# Altium PCB 23970修改.PcbDoc (part 1 of 2)
Units mm, origin at the board's own origin, x right, y up, seen from the top; angles counter-clockwise.
Board outline 62.06 x 76 mm, 2 copper layers (Top Layer, Bottom Layer); 25 components, 55 nets, 531 pads, 222 vias.
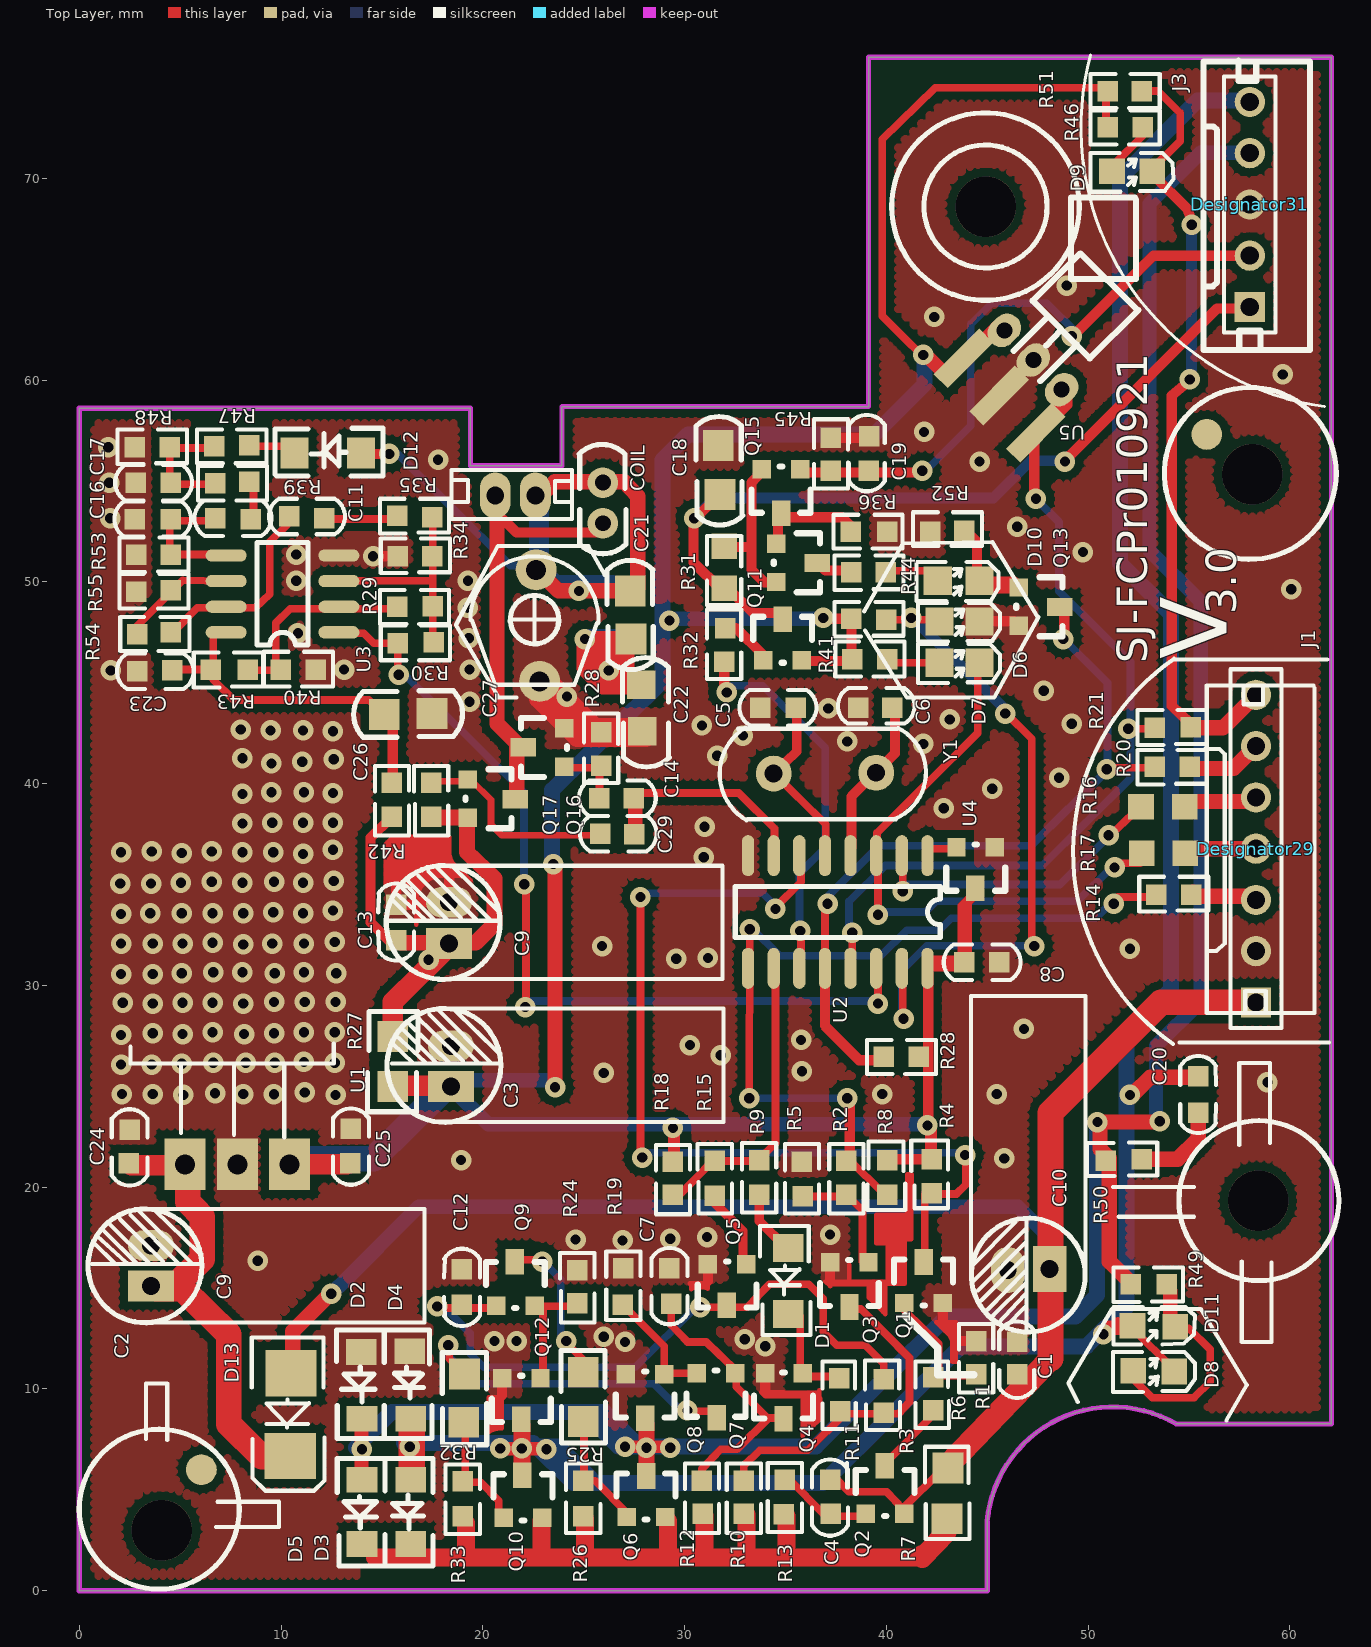
[diagram p0: Top Layer view]
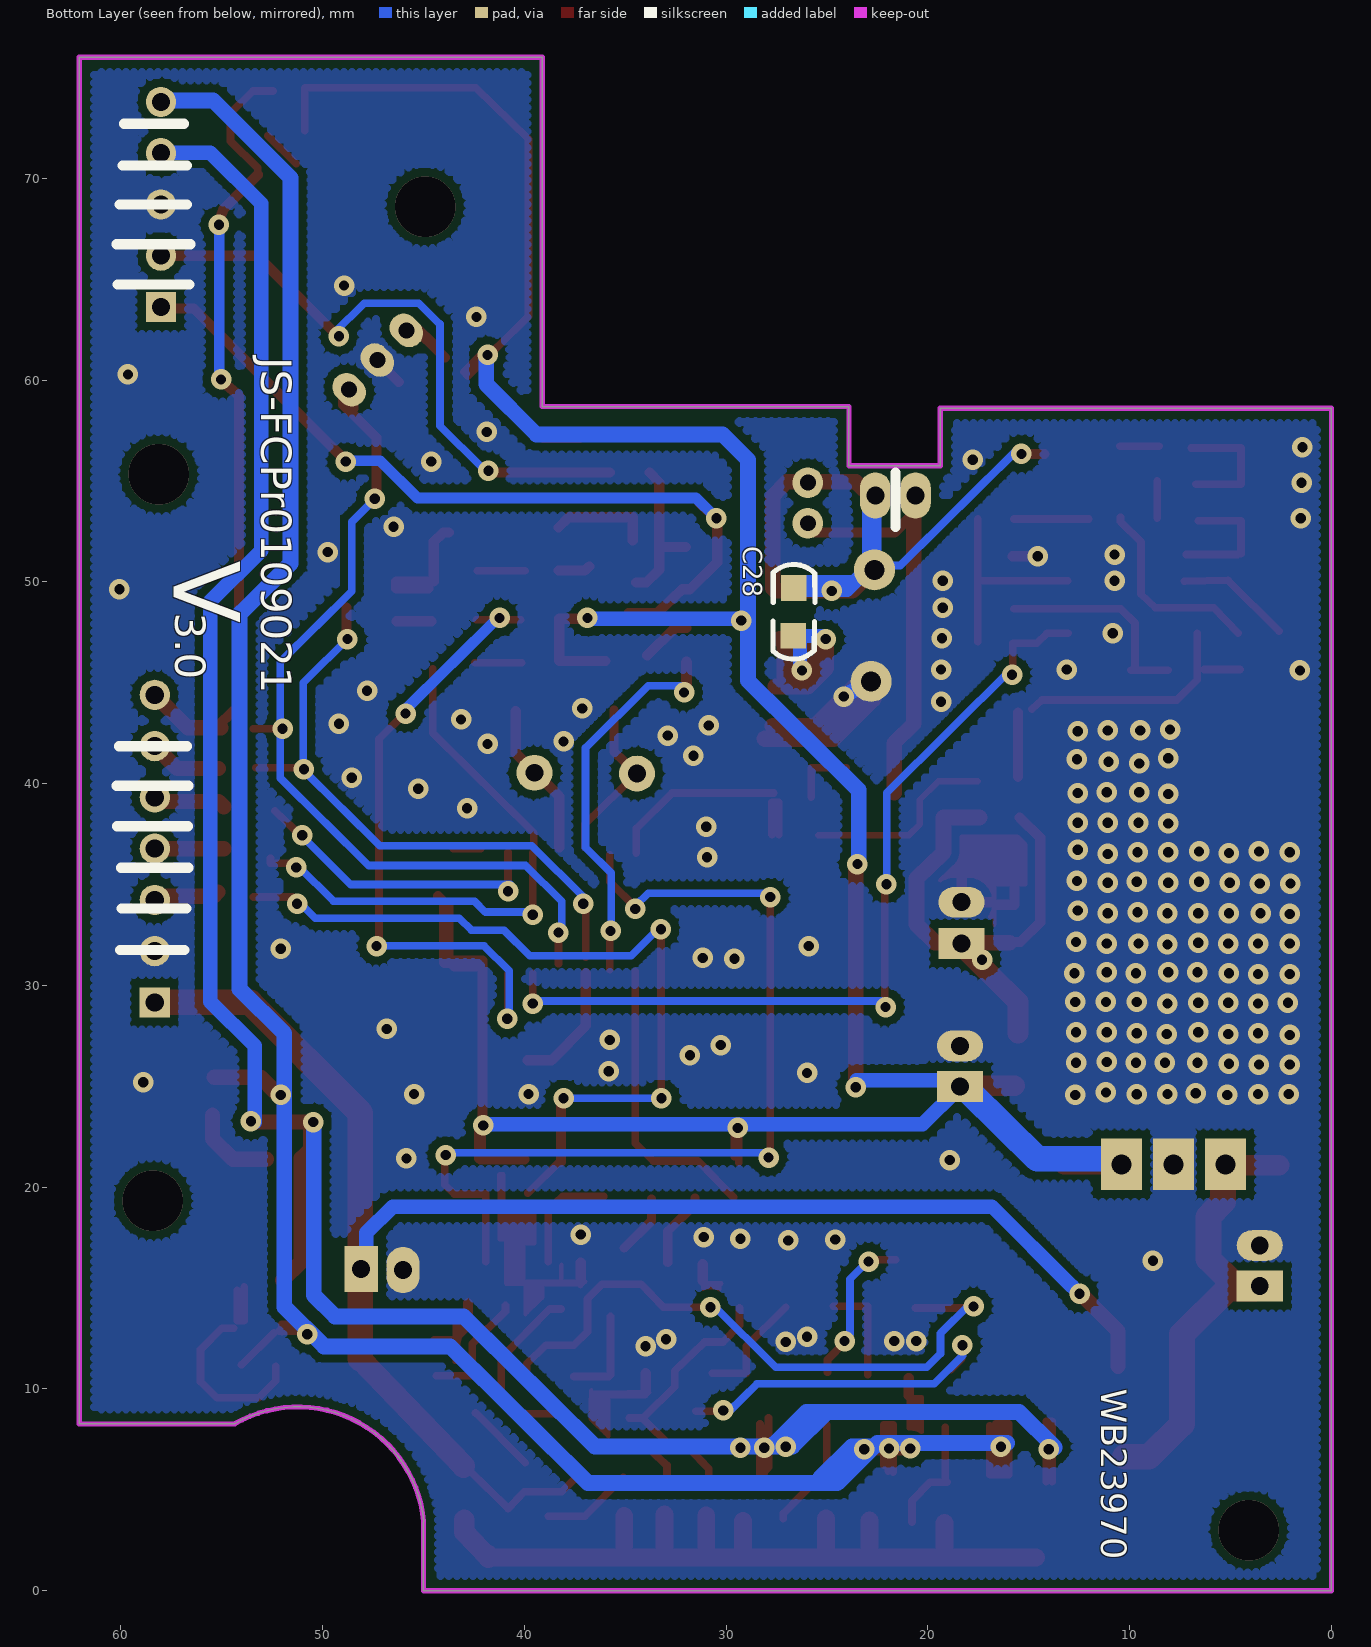
[diagram p1: Bottom Layer view, seen from below]

## Layer stack, top to bottom
Top Layer: signal copper 0.0356
Dielectric: core 0.32, FR-4, Dk 4.8
Bottom Layer: signal copper 0.0356

## Board outline
0,0 0,58.606 19.389,58.606 19.389,55.755 23.918,55.755 23.918,58.689 39.116,58.689 39.116,76 62.061,76 62.061,8.267 54.356,8.267 54.367,8.267 ccw(c51.223,2.86) 44.995,3.426 45,3.405 45,0

## Design rules (kind name [scope] priority, off if disabled: settings)
Clearance [All] p1: gap=0.2
PolygonConnect [All] p1: connectstyle=Direct reliefconductorwidth=0.254 reliefentries=4 polygonreliefangle="90 Angle"
RoutingPriority [All] p1: routingpriority=4
RoutingVias [All] p1: holewidth=0.508 width=1.27 viastyle="Through Hole" minholewidth=0.711 minwidth=1.27 maxholewidth=0.711 maxwidth=1.27
SilkscreenOverComponentPads [All] p1: minsilkscreentomaskgap=0.254
SolderMaskExpansion SolderMaskExpansion_2 [HasPad('Free-266')] p1: expansion=0.051
SolderMaskExpansion SolderMaskExpansion_1 [HasPad('Free-267')] p2: expansion=0.051
SolderMaskExpansion [All] p3: expansion=0.102
Width [All] p1: maxlimit=0.254 minlimit=0.254 preferedwidth=0.254
26 further rules are at their usual default settings.

## Components (designator, comment, footprint, x,y, rotation, side; value= is the part's Value field where it differs from the comment)
Designator29 "Comment" HDR1X7 58.318,29.159 r90 top
Designator31 "Comment" HDR1X5 58.013,63.627 r90 top
? "" a 62.061,8.267 r180 top
? "" SO-16 42.037,36.433 r270 top
? "" SOT-23#1 21.04,3.614 r0 top
? "" SOT-23#2 27.136,3.656 r0 top
? "" SOT-23#3 38.989,3.824 r0 top
? "" SOT-23#4 40.894,14.26 r0 top
? "" SOT-23#5 39.116,16.272 r180 top
? "" SOT-23#6 33.062,16.188 r180 top
? "" SOT-23#7 20.659,14.135 r0 top
? "" SOT-23#8 22.86,10.53 r180 top
? "" SOT-23#9 28.998,10.74 r180 top
? "" SOT-23#10 32.512,10.782 r180 top
? "" SOT-23#11 35.856,10.698 r180 top
? "" SOT-23#12 45.381,36.852 r180 top
? "" SOT-23#13 19.262,40.205 r270 top
? "" SOT-23#14 35.729,55.588 r180 top
? "" SOT-23#15 34.544,51.899 r270 top
? "" SOT-23#16 24.045,40.834 r90 top
? "" SOT-23#17 33.909,46.115 r0 top
? "" SOT-23#18 46.567,49.72 r270 top
? "" SO-8 12.869,47.498 r180 top
? "" a 0,0 r90 top
? "" a 62.061,76 r270 top

## Footprints (in the part's own frame and the unit in brackets; to place one, negate y for a bottom-side part, rotate by r counter-clockwise, add the part's x,y. Pads: shape width x height; smd on the part's side, far side on the other; paste and mask are expansions set on the pad)
a [mm]
  Keep-Out Layer lines w0.254: 0.406,0 0,0 0,-0.406
HDR1X5 [mm] "Connector; Header; 5 Position"
  rect 1.5x1.5 hole 0.9: 1(0,0)
  round 1.5 hole 0.9: 2(2.54,0) 3(5.08,0) 4(7.62,0) 5(10.16,0)
  silkscreen extent -1.27,-1.27 11.43,1.27
HDR1X7 [mm] "Connector; Header; 7 Position"
  rect 1.5x1.5 hole 0.9: 1(0,0)
  round 1.5 hole 0.9: 2(2.54,0) 3(5.08,0) 4(7.62,0) 5(10.16,0) 6(12.7,0) 7(15.24,0)
  silkscreen extent -1.27,-1.27 16.51,1.27
SO-8 [mil]
  oval 80x24 smd: 71(220,0) 72(220,-50) 73(220,-100) 74(220,-150) 75(0,-150) 76(0,-100) 77(0,-50) 78(0,0)
  silkscreen extent 60,-175 160,25
SO-16 [mil]
  oval 80x24 smd: 1(220,0) 2(220,-50) 3(220,-100) 4(220,-150) 5(220,-200) 6(220,-250) 7(220,-300) 8(220,-350) 9(0,-350) 10(0,-300) 11(0,-250) 12(0,-200) 13(0,-150) 14(0,-100) 15(0,-50) 16(0,0)
  silkscreen extent 60,-375 160,25
SOT-23#1 [mil]
  rect 36x36 smd: 17(0,0) 18(75,0)
  rect 36x50 smd: 19(35.89,83.33)
  silkscreen extent -20,-5 95,85
SOT-23#2 [mil]
  rect 36x36 smd: 20(0,0) 21(75,0)
  rect 36x50 smd: 22(38,80)
  silkscreen extent -20,-5 95,85
SOT-23#3 [mil]
  rect 36x36 smd: 23(0,0) 24(75,0)
  rect 36x50 smd: 25(36.72,93.65)
  silkscreen extent -20,-5 95,85
SOT-23#4 [mil]
  rect 36x36 smd: 26(0,0) 27(75,0)
  rect 36x50 smd: 28(38,80)
  silkscreen extent -20,-5 95,85
SOT-23#5 [mil]
  rect 36x36 smd: 29(0,0) 30(75,0)
  rect 36x50 smd: 31(37.13,87.05)
  silkscreen extent -20,-5 95,85
SOT-23#6 [mil]
  rect 36x36 smd: 32(0,0) 33(75,0)
  rect 36x50 smd: 34(38,80)
  silkscreen extent -20,-5 95,85
SOT-23#7 [mil]
  rect 36x36 smd: 35(0,0) 36(75,0)
  rect 36x50 smd: 37(36.72,85.81)
  silkscreen extent -20,-5 95,85
SOT-23#8 [mil]
  rect 36x36 smd: 38(0,0) 39(75,0)
  rect 36x50 smd: 40(38,80)
  silkscreen extent -20,-5 95,85
SOT-23#9 [mil]
  rect 36x36 smd: 41(0,0) 42(75,0)
  rect 36x50 smd: 43(37.13,86.22)
  silkscreen extent -20,-5 95,85
SOT-23#10 [mil]
  rect 36x36 smd: 44(0,0) 45(75,0)
  rect 36x50 smd: 46(36.3,87.05)
  silkscreen extent -20,-5 95,85
SOT-23#11 [mil]
  rect 36x36 smd: 47(0,-2.89) 48(73.43,-3.3)
  rect 36x50 smd: 49(37.54,85.81)
  silkscreen extent -20,-5 95,85
SOT-23#12 [mil]
  rect 36x36 smd: 50(0,0) 51(75,0)
  rect 36x50 smd: 52(38,80)
  silkscreen extent -20,-5 95,85
SOT-23#13 [mil]
  rect 36x36 smd: 53(0,0) 54(75,0)
  rect 36x50 smd: 55(38.37,92.41)
  silkscreen extent -20,-5 95,85
SOT-23#14 [mil]
  rect 36x36 smd: 56(0,0) 57(75,0)
  rect 36x50 smd: 58(37.13,86.22)
  silkscreen extent -20,-5 95,85
SOT-23#15 [mil]
  rect 36x36 smd: 59(0,0) 60(75,0)
  rect 36x50 smd: 61(38.01,80)
  silkscreen extent -20,-5 95,85
SOT-23#16 [mil]
  rect 36x36 smd: 62(0,0) 63(75,0)
  rect 36x50 smd: 64(38.01,80)
  silkscreen extent -20,-5 95,85
SOT-23#17 [mil]
  rect 36x36 smd: 65(0,0) 66(75,0)
  rect 36x50 smd: 67(38.01,80)
  silkscreen extent -20,-5 95,85
SOT-23#18 [mil]
  rect 36x36 smd: 68(0,0) 69(75,0)
  rect 36x50 smd: 70(38.01,80)
  silkscreen extent -20,-5 95,85

## Free pads (board coordinates)
  round 0.254 all layers, no hole: 0(1.439,56.678) 0(1.482,54.917) 0(1.524,53.157) 0(1.566,45.612) 0(2.032,35.05) 0(2.074,26.08) 0(2.074,27.547) 0(2.074,30.565) 0(2.074,32.074) 0(2.074,33.541) 0(2.074,36.601) 0(2.117,24.613) 0(2.159,29.14) 0(3.514,33.583) 0(3.556,35.05) 0(3.598,26.08) 0(3.598,36.643) 0(3.641,24.613) 0(3.641,27.631) 0(3.641,29.098) 0(3.641,30.565) 0(3.641,32.074) 0(5.038,35.092) 0(5.08,26.122) 0(5.08,30.607) 0(5.08,33.583) 0(5.08,36.559) 0(5.122,27.589) 0(5.122,29.14) 0(5.122,32.074) 0(5.165,24.571) 0(6.562,35.134) 0(6.562,36.643) 0(6.604,27.673) 0(6.604,29.14) 0(6.604,32.116) 0(6.604,33.583) 0(6.646,26.164) 0(6.646,30.649) 0(6.731,24.655) 0(8.001,42.678) 0(8.086,30.649) 0(8.086,35.092) 0(8.086,36.601) 0(8.086,38.026) 0(8.086,39.493) 0(8.086,41.253) 0(8.128,24.613) 0(8.128,29.098) 0(8.128,32.032) 0(8.128,33.583) 0(8.17,27.589) 0(8.255,26.164) 0(8.848,16.356) 0(9.483,42.636) 0(9.525,39.577) 0(9.525,41.002) 0(9.567,32.074) 0(9.567,38.068) 0(9.61,33.625) 0(9.61,36.601) 0(9.652,24.613) 0(9.652,27.631) 0(9.652,29.182) 0(9.652,35.134) 0(9.694,26.164) 0(9.694,30.607) 0(10.753,50.055) 0(10.753,51.354) 0(10.837,47.456) 0(11.049,41.085) 0(11.091,33.583) 0(11.091,35.092) 0(11.091,36.517) 0(11.091,38.068) 0(11.091,42.636) 0(11.134,26.206) 0(11.134,27.673) 0(11.134,30.649) 0(11.134,32.074) 0(11.134,39.577) 0(11.176,24.697) 0(11.176,29.182) 0(12.488,14.721) 0(12.573,33.709) 0(12.573,36.726) 0(12.573,38.068) 0(12.573,39.535) 0(12.573,42.594) 0(12.615,35.176) 0(12.615,41.211) 0(12.658,26.164) 0(12.658,27.673) 0(12.658,32.158) 0(12.7,24.571) 0(12.7,29.182) 0(12.742,30.607) 0(13.123,45.654) 0(14.012,7.009) 0(14.563,51.271) 0(15.367,56.342) 0(15.833,45.403) 0(16.383,7.135) 0(17.314,31.278) 0(17.738,14.093) 0(17.78,56.049) 0(18.288,12.165) 0(18.923,21.344) 0(19.262,48.714) 0(19.262,50.055) 0(19.304,47.205) 0(19.346,44.061) 0(19.346,45.654) 0(20.574,12.374) 0(20.87,7.051) 0(21.675,12.374) 0(21.929,7.051) 0(22.056,35.008) 0(22.098,28.93) 0(22.945,16.314) 0(23.156,7.009) 0(23.495,36.014) 0(23.58,24.949) 0(24.13,12.374) 0(24.172,44.313) 0(24.596,17.404) 0(24.765,49.552) 0(25.061,47.163) 0(25.908,31.948) 0(25.993,12.584) 0(25.993,25.661) 0(26.247,45.612) 0(26.924,17.362) 0(27.051,7.135) 0(27.051,12.332) 0(27.813,34.379) 0(27.898,21.47) 0(28.109,7.093) 0(29.252,48.085) 0(29.295,7.093) 0(29.295,17.446) 0(29.422,22.937) 0(29.591,31.319) 0(30.141,8.937) 0(30.268,27.044) 0(30.48,53.157) 0(30.776,14.051) 0(30.861,42.888) 0(30.946,36.349) 0(30.988,37.858) 0(31.115,17.53) 0(31.157,31.361) 0(31.623,41.379) 0(31.792,26.541) 0(32.089,44.522) 0(32.893,42.385) 0(32.978,12.458) 0(33.21,24.404) 0(33.232,32.786) 0(33.994,12.123) 0(34.502,33.792) 0(35.729,32.703) 0(35.772,27.296) 0(35.814,25.745) 0(36.872,48.211) 0(37.084,34.044) 0(37.126,43.726) 0(37.211,17.655) 0(38.058,24.404) 0(38.058,42.091) 0(38.312,32.619) 0(39.582,29.098) 0(39.582,33.499) 0(39.793,24.613) 0(40.809,34.673) 0(40.852,28.344) 0(41.233,48.211) 0(41.783,55.504) 0(41.825,41.966) 0(41.825,61.246) 0(41.868,57.432) 0(42.037,23.062) 0(42.376,63.132) 0(42.841,38.78) 0(43.138,43.181) 0(43.9,21.595) 0(44.619,55.965) 0(45.254,39.744) 0(45.466,24.613) 0(45.847,21.428) 0(45.889,43.475) 0(46.482,52.738) 0(46.821,27.841) 0(47.329,31.948) 0(47.413,54.121) 0(47.794,44.606) 0(48.556,40.289) 0(48.768,47.163) 0(48.853,55.965) 0(48.937,64.683) 0(49.191,42.972) 0(49.191,62.168) 0(49.742,51.48) 0(50.461,23.23) 0(50.758,12.71) 0(50.927,40.708) 0(51.012,37.439) 0(51.266,34.044) 0(51.308,35.846) 0(51.985,42.72) 0(52.07,24.571) 0(52.07,31.822) 0(53.552,23.272) 0(55.033,60.031) 0(55.139,67.701) 0(58.886,25.2) 0(59.648,60.282) 0(60.071,49.636)
  round 0.584 on Top Solder: 7(19.795,56.162) 7(23.512,56.162)
  round 0.584 on Bottom Solder: 7(19.795,56.162) 7(23.512,56.162)
  round 1.524 smd: 79(6.054,6.003) 80(55.88,57.306)
  rect 1.016x1.016 smd: 81(52.663,74.323) 82(52.705,72.521) 83(50.969,72.521) 84(50.969,74.323) 85(55.076,42.804) 86(55.033,40.834) 87(53.298,42.762) 88(53.298,40.834) 89(55.118,34.505) 90(53.382,34.505) 91(55.457,23.691) 92(55.457,25.493) 93(52.663,21.386) 94(50.885,21.302) 95(52.112,15.183) 96(53.89,15.183) 97(42.249,21.386) 98(42.249,19.709) 99(41.614,26.457) 100(39.878,26.457) 101(40.047,21.344) 102(40.047,19.625) 103(38.015,21.302) 104(38.015,19.625) 105(35.814,21.26) 106(35.856,19.542) 107(33.697,21.344) 108(33.697,19.625) 109(31.496,21.302) 110(31.496,19.584) 111(29.422,21.26) 112(29.422,19.625) 113(29.252,15.979) 114(29.337,14.218) 115(26.966,15.979) 116(26.924,14.177) 117(24.68,14.26) 118(24.68,15.895) 119(24.977,5.458) 120(24.977,3.698) 121(19.008,3.698) 122(19.008,5.416) 123(18.965,14.177) 124(18.965,15.937) 125(13.462,22.895) 126(13.42,21.176) 127(15.706,32.242) 128(15.706,34.002) 129(17.441,38.361) 130(17.441,40.038) 131(15.494,40.038) 132(15.494,38.361) 133(15.79,46.953) 134(17.568,46.995) 135(17.526,48.798) 136(15.748,48.756) 137(17.484,51.271) 138(15.79,51.271) 139(15.748,53.283) 140(17.484,53.199) 141(12.15,53.157) 142(10.414,53.241) 143(8.509,53.115) 144(6.731,53.157) 145(6.731,54.875) 146(8.424,54.959) 147(8.424,56.761) 148(6.689,56.719) 149(4.487,56.678) 150(2.752,56.678) 151(2.794,54.917) 152(4.53,54.917) 153(4.53,53.115) 154(2.752,53.115) 155(4.53,51.354) 156(2.836,51.354) 157(4.53,49.594) 158(2.836,49.51) 159(4.53,47.498) 160(2.879,47.415) 161(2.879,45.57) 162(4.614,45.612) 163(6.519,45.654) 164(8.34,45.654) 165(9.991,45.654) 166(11.726,45.654) 167(30.861,5.458) 168(30.903,3.824) 169(32.935,5.458) 170(32.935,3.824) 171(34.967,5.5) 172(34.925,3.782) 173(37.211,5.5) 174(37.253,3.824) 175(39.878,10.488) 176(39.878,8.812) 177(37.677,10.53) 178(37.719,8.895) 179(42.333,10.572) 180(42.333,8.937) 181(44.45,10.74) 182(46.482,10.74) 183(43.857,31.152) 184(45.593,31.152) 185(33.74,43.768) 186(35.518,43.768) 187(38.608,43.774) 188(40.301,43.768) 189(40.047,46.157) 190(38.312,46.157) 191(38.269,48.169) 192(40.005,48.127) 193(38.269,50.474) 194(39.963,50.474) 195(38.227,52.486) 196(40.047,52.486) 197(42.164,52.486) 198(43.857,52.528) 199(39.116,55.504) 200(39.158,57.222) 201(37.253,57.139) 202(37.253,55.504) 203(25.866,40.876) 204(25.866,42.552) 205(2.498,22.853) 206(2.455,21.176) 207(31.962,46.031) 208(32.004,47.708) 209(25.781,39.283) 210(25.823,37.523) 211(27.474,39.283) 212(27.517,37.481) 264(46.482,12.332) 265(44.45,12.374)
  rect 1.27x1.27 smd: 213(54.779,38.864) 214(52.62,38.864) 215(52.663,36.559) 216(54.822,36.559) 217(52.197,13.129) 218(54.314,13.087) 219(54.271,10.865) 220(52.239,10.907) 221(31.962,51.774) 222(31.962,49.678) 225(53.171,70.342) 226(51.181,70.342)
  rect 1.397x1.397 smd: 223(27.898,42.594) 224(27.855,44.9) 253(42.545,50.055) 254(42.63,48.043) 255(42.63,45.989) 256(44.619,45.989) 257(44.619,48.043) 258(44.619,50.055)
  rect 1.524x1.524 smd: 227(43.053,6.087) 228(43.011,3.572) 229(24.977,8.392) 230(24.977,10.823) 231(19.05,8.351) 232(19.092,10.74) 241(15.536,24.99) 242(15.536,27.463) 243(17.484,43.475) 244(15.113,43.433) 245(27.305,49.552) 246(27.347,47.163) 247(31.75,54.33) 248(31.665,56.761)
  rect 1.524x1.27 smd: 233(16.425,2.315) 234(16.425,5.5) 235(14.012,5.5) 236(14.012,2.315) 237(16.425,8.518) 238(14.012,8.518) 239(16.383,11.871) 240(13.97,11.829)
  rect 1.524x1.397 smd: 249(35.137,13.716) 250(35.137,16.985)
  rect 1.397x1.524 smd: 251(10.668,56.384) 252(13.97,56.384)
  rect 2.54x2.286 smd: 259(10.456,6.674) 260(10.499,10.782)
  rect 0.991x3.2 smd rot 135: 261(47.413,57.39) 262(45.593,59.234) 263(43.815,61.079)
  rect 1.27x1.27 smd far side: 266(26.649,49.699) 267(26.67,47.331)
  oval 2.286x1.524 hole 0.889: 281(18.33,34.128) 282(18.415,27.002) 283(3.556,17.111)
  rect 2.286x1.524 hole 0.889: 284(3.556,15.099) 285(18.415,24.99) 286(18.33,32.074)
  rect 1.651x2.286 hole 0.889: 287(48.091,15.937)
  oval 1.651x2.286 hole 0.889: 288(46.016,15.895)
  oval 1.524x2.286 hole 0.889: 289(22.606,54.288) 290(20.616,54.288)
  rect 2.032x2.54 hole 0.991: 291(10.414,21.134) 292(7.832,21.134) 293(5.249,21.134)
  oval 1.778x1.397 hole 0.787 rot 45: 294(48.683,59.528) 295(47.286,60.995) 296(45.847,62.462)
  round 1.524 hole 0.787: 297(25.95,52.905) 298(25.95,54.917)
  round 2.032 hole 0.991: 299(22.648,50.6) 300(22.818,45.067)
  round 1.778 hole 0.889: 301(34.417,40.499) 302(39.497,40.541)
  round 2.997 on Top Solder: 303(58.42,19.332) 304(58.124,55.336) 305(44.916,68.602) 306(4.106,3.027)
  round 2.997 on Bottom Solder: 303(58.42,19.332) 304(58.124,55.336) 305(44.916,68.602) 306(4.106,3.027)

## Via types
v1: diameter 1.016, hole 0.508, Top Layer to Bottom Layer, 218 vias
v2: diameter 3, hole 3, Top Layer to Bottom Layer, 4 vias

## Nets (pads, with @x,y where several pads share a name; then routed paths per layer and width w, separated by ;. In a path a pad name is that pad's centre, name@x,y a point inside that pad or via, vN(x,y) a via of type N, cw(c..) or ccw(c..) an arc to the next point about the centre after c; other vN are vias at no path point)
NewNet1: 
NewNet2: ?.71 pad.131 pad.162 pad.163 pad.244 | length 16.1
  Top Layer w0.381: pad.162@4.53,45.654 pad.163@6.308,45.654 ; ?.71@6.646,47.456 6.646,45.151 7.662,44.145 14.351,44.145 pad.244@14.859,43.684
  Top Layer w0.508: pad.131@15.536,40.331 pad.244@15.536,43.516
NewNet3: ?.72 pad.142 pad.159 | length 9.9
  Top Layer w0.381: pad.159@4.614,47.456 5.842,48.714 8.721,48.714 9.44,49.385 9.44,51.983 10.456,52.989 pad.142@10.456,53.199
NewNet4: ?.73 pad.157 pad.160 | length 5.7
  Top Layer w0.381: pad.160@2.599,47.549 5.131,50.073 ?.73@7.281,50.038
NewNet5: ?.74 pad.144 pad.153 pad.155 | length 6.3
  Top Layer w0.381: pad.155@4.487,51.396 4.487,53.031 pad.144@6.604,53.031 ; pad.155@4.657,51.354 ?.74@7.197,51.354
NewNet6: ?.9 ?.27 ?.30 ?.33 ?.39 ?.42 ?.48 ?.50 ?.63 ?.69 ?.75 Designator29.2 Designator31.3 pad.0@1.439,56.678 pad.0@1.482,54.917 pad.0@1.524,53.157 pad.0@1.566,45.612 pad.0@2.032,35.05 pad.0@2.074,26.08 pad.0@2.074,27.547 pad.0@2.074,30.565 pad.0@2.074,32.074 pad.0@2.074,33.541 pad.0@2.074,36.601 pad.0@2.117,24.613 pad.0@2.159,29.14 pad.0@3.514,33.583 pad.0@3.556,35.05 pad.0@3.598,26.08 pad.0@3.598,36.643 pad.0@3.641,24.613 pad.0@3.641,27.631 pad.0@3.641,29.098 pad.0@3.641,30.565 pad.0@3.641,32.074 pad.0@5.08,26.122 pad.0@5.08,30.607 pad.0@5.08,33.583 pad.0@5.08,36.559 pad.0@5.038,35.092 pad.0@5.122,27.589 pad.0@5.122,29.14 pad.0@5.122,32.074 pad.0@5.165,24.571 pad.0@6.562,35.134 pad.0@6.562,36.643 pad.0@6.604,27.673 pad.0@6.604,29.14 pad.0@6.604,32.116 pad.0@6.604,33.583 pad.0@6.646,26.164 pad.0@6.646,30.649 pad.0@6.731,24.655 pad.0@8.001,42.678 pad.0@8.17,27.589 pad.0@8.086,30.649 pad.0@8.086,35.092 pad.0@8.086,36.601 pad.0@8.086,38.026 pad.0@8.086,39.493 pad.0@8.086,41.253 pad.0@8.128,24.613 pad.0@8.128,29.098 pad.0@8.128,32.032 pad.0@8.128,33.583 pad.0@8.255,26.164 pad.0@8.848,16.356 pad.0@9.61,33.625 pad.0@9.61,36.601 pad.0@9.483,42.636 pad.0@9.525,39.577 pad.0@9.525,41.002 pad.0@9.567,32.074 pad.0@9.567,38.068 pad.0@9.652,24.613 pad.0@9.652,27.631 pad.0@9.652,29.182 pad.0@9.652,35.134 pad.0@9.694,26.164 pad.0@9.694,30.607 pad.0@10.753,50.055 pad.0@10.753,51.354 pad.0@10.837,47.456 pad.0@11.049,41.085 pad.0@11.091,33.583 pad.0@11.091,35.092 pad.0@11.091,36.517 pad.0@11.091,38.068 pad.0@11.091,42.636 pad.0@11.134,26.206 pad.0@11.134,27.673 pad.0@11.134,30.649 pad.0@11.134,32.074 pad.0@11.134,39.577 pad.0@11.176,24.697 pad.0@11.176,29.182 pad.0@12.7,24.571 pad.0@12.7,29.182 pad.0@12.573,33.709 pad.0@12.573,36.726 pad.0@12.573,38.068 pad.0@12.573,39.535 pad.0@12.573,42.594 pad.0@12.615,35.176 pad.0@12.615,41.211 pad.0@12.658,26.164 pad.0@12.658,27.673 pad.0@12.658,32.158 pad.0@12.742,30.607 pad.0@13.123,45.654 pad.0@14.563,51.271 pad.0@17.78,56.049 pad.0@18.923,21.344 pad.0@19.262,48.714 pad.0@19.262,50.055 pad.0@19.304,47.205 pad.0@19.346,44.061 pad.0@19.346,45.654 pad.0@20.574,12.374 pad.0@21.675,12.374 pad.0@24.172,44.313 pad.0@24.596,17.404 pad.0@25.908,31.948 pad.0@25.993,12.584 pad.0@25.993,25.661 pad.0@26.924,17.362 pad.0@27.051,12.332 pad.0@29.295,17.446 pad.0@29.591,31.319 pad.0@30.268,27.044 pad.0@30.861,42.888 pad.0@30.946,36.349 pad.0@30.988,37.858 pad.0@31.115,17.53 pad.0@31.157,31.361 pad.0@31.623,41.379 pad.0@31.792,26.541 pad.0@32.893,42.385 pad.0@32.978,12.458 pad.0@33.994,12.123 pad.0@35.772,27.296 pad.0@35.814,25.745 pad.0@37.126,43.726 pad.0@37.211,17.655 pad.0@38.058,42.091 pad.0@39.793,24.613 pad.0@41.825,41.966 pad.0@41.868,57.432 pad.0@42.376,63.132 pad.0@42.841,38.78 pad.0@43.138,43.181 pad.0@44.619,55.965 pad.0@45.254,39.744 pad.0@45.466,24.613 pad.0@45.847,21.428 pad.0@46.482,52.738 pad.0@46.821,27.841 pad.0@47.794,44.606 pad.0@48.556,40.289 pad.0@48.937,64.683 pad.0@49.191,42.972 pad.0@49.742,51.48 pad.0@52.07,31.822 pad.0@58.886,25.2 pad.0@59.648,60.282 pad.0@60.071,49.636 pad.105 pad.113 pad.115 pad.118 pad.124 pad.125 pad.128 pad.138 pad.150 pad.151 pad.154 pad.156 pad.158 pad.161 pad.166 pad.184 pad.185 pad.187 pad.196 pad.197 pad.200 pad.201 pad.204 pad.205 pad.223 pad.239 pad.240 pad.243 pad.248 pad.257 pad.262 pad.264 pad.265 pad.281 pad.282 pad.283 pad.288 pad.292 pad.295 pad.300 | length 263.1
  Top Layer w0.216: v1@14.372,51.254 v1@14.793,51.254 ; 15.179,35.201 17.254,35.201 ; 15.179,35.404 17.7,35.404 ; 15.179,35.608 18.98,35.608 ; 15.179,35.811 18.768,35.811 ; 15.179,36.014 18.56,36.014 ; 15.179,36.217 18.424,36.217 ; 15.179,36.42 18.355,36.42 ; 15.179,36.624 18.337,36.624 ; 15.179,36.827 18.337,36.827 ; 15.206,37.03 18.337,37.03 ; 15.265,34.999 15.265,37.089 ; 15.411,37.233 18.337,37.233 ; 15.469,34.999 15.469,37.29 ; 15.672,34.999 15.672,37.364 ; 15.875,34.999 15.875,37.364 ; 16.078,34.999 16.078,37.364 ; 16.281,34.999 16.281,37.364 ; 16.444,37.364 15.543,37.364 15.179,37.003 15.179,34.999 16.703,34.999 16.703,34.233 cw(c18.013,34.128) 18.013,35.442 18.648,35.442 cw(c18.648,34.128) 19.395,35.209 18.609,35.963 cw(c19.219,36.601) 18.337,36.601 ; 16.491,37.364 18.315,37.364 ; 16.688,34.999 16.688,37.364 ; 16.698,33.005 16.698,33.239 16.698,33.388 ; 16.703,33.576 16.82,33.576 ; 16.703,34.592 16.783,34.592 ; 16.703,34.795 16.88,34.795 ; 16.703,34.998 17.028,34.998 ; 16.891,34.813 16.891,37.364 ; 17.094,35.068 17.094,37.364 ; 17.297,35.23 17.297,37.364 ; 17.501,35.338 17.501,37.364 ; 17.704,35.405 17.704,37.364 ; 17.907,35.438 17.907,37.364 ; 18.11,35.442 18.11,37.364 ; 18.313,35.442 18.313,37.364 ; 18.337,37.354 18.337,36.601 ; 18.517,35.442 18.517,36.067 ; 18.608,35.964 cw(c19.219,36.601) 18.337,36.601 ; 18.72,35.44 18.72,35.857 ; 18.923,35.413 18.923,35.662 ; 18.961,35.404 19.192,35.404 ; 19.126,35.352 19.126,35.467 ; 20.301,7.972 20.489,7.972 ; 20.301,8.176 20.949,8.176 ; 20.301,8.379 20.949,8.379 ; 20.301,8.582 20.949,8.582 ; 20.301,8.785 20.949,8.785 ; 20.301,8.988 20.949,8.988 ; 20.301,9.192 20.949,9.192 ; 20.301,9.395 20.949,9.395 ; 20.301,9.584 20.301,9.489 20.301,7.87 cw(c20.87,7.051) 20.87,8.048 cw(c20.87,7.051) 20.949,8.045 20.949,9.584 20.343,9.584 20.343,9.489 ; 20.345,7.899 20.345,9.584 ; 20.549,7.995 20.549,9.584 ; 20.752,8.041 20.752,9.584 ; 30.249,15.215 30.334,15.215 30.334,14.944 cw(c30.776,14.051) 30.776,15.048 cw(c30.776,14.051) 31.151,14.975 31.151,15.242 30.249,15.242 ; 30.334,15.084 31.151,15.084 ; 30.505,15.01 30.505,15.242 ; 30.709,15.045 30.709,15.242 ; 30.912,15.039 30.912,15.242 ; 31.115,14.988 31.115,15.242 ; 33.833,9.801 36.68,9.801 ; 33.96,9.675 33.96,9.835 ; 34.163,9.642 34.163,9.835 ; 34.366,9.642 34.366,9.835 ; 34.569,9.642 34.569,9.835 ; 34.773,9.642 34.773,9.835 ; 34.91,9.825 36.68,9.825 ; 34.91,9.835 33.798,9.835 33.994,9.642 35.849,9.642 35.849,7.665 36.722,8.529 36.722,9.533 ; 34.976,9.642 34.976,9.825 ; 35.179,9.642 35.179,9.825 ; 35.382,9.642 35.382,9.825 ; 35.585,9.642 35.585,9.825 ; 35.789,9.642 35.789,9.825 ; 35.849,7.769 35.954,7.769 ; 35.849,7.972 36.16,7.972 ; 35.849,8.176 36.365,8.176 ; 35.849,8.379 36.57,8.379 ; 35.849,8.582 36.722,8.582 ; 35.849,8.785 36.722,8.785 ; 35.849,8.988 36.722,8.988 ; 35.849,9.192 36.722,9.192 ; 35.849,9.395 36.722,9.395 ; 35.849,9.598 36.68,9.598 ; 35.992,7.806 35.992,9.825 ; 36.195,8.007 36.195,9.825 ; 36.398,8.209 36.398,9.825 ; 36.601,8.41 36.601,9.825 ; 36.68,9.533 36.68,9.825 ; 36.68,9.934 36.68,9.825 ; 37.012,15.288 40.913,15.288 ; 37.211,15.091 37.211,15.326 ; 37.414,15.185 37.414,15.326 ; 37.617,15.185 37.617,15.326 ; 37.821,15.185 37.821,15.326 ; 38.024,15.185 38.024,15.326 ; 38.157,16.163 38.157,15.326 36.973,15.326 37.227,15.075 37.227,15.185 39.119,15.185 39.119,14.527 ; 38.17,16.116 38.17,15.326 40.062,15.326 40.062,17.218 39.499,17.218 39.499,18.628 41.044,18.628 41.044,20.347 ; 38.227,15.185 38.227,15.326 ; 38.43,15.185 38.43,15.326 ; 38.633,15.185 38.633,15.326 ; 38.837,15.185 38.837,15.326 ; 39.04,15.185 39.04,15.326 ; 39.119,14.678 39.948,14.678 ; 39.119,14.881 39.948,14.881 ; 39.119,15.084 39.948,15.084 ; 39.187,14.475 39.948,14.475 ; 39.243,14.42 39.243,15.326 ; 39.39,14.272 39.948,14.272 ; 39.446,14.215 39.446,15.326 ; 39.499,17.32 40.913,17.32 ; 39.499,17.523 41.231,17.523 ; 39.499,17.726 41.231,17.726 ; 39.499,17.929 41.231,17.929 ; 39.499,18.132 41.231,18.132 ; 39.499,18.336 41.231,18.336 ; 39.499,18.539 41.231,18.539 ; 39.592,14.068 39.948,14.068 ; 39.649,14.01 39.649,15.326 ; 39.649,17.218 39.649,18.628 ; 39.793,13.865 39.948,13.865 ; 39.853,13.806 39.853,15.326 ; 39.853,17.218 39.853,18.628 ; 40.056,15.207 40.056,15.326 ; 40.056,17.218 40.056,18.628 ; 40.062,15.491 40.913,15.491 ; 40.062,15.694 40.913,15.694 ; 40.062,15.897 40.913,15.897 ; 40.062,16.1 40.913,16.1 ; 40.062,16.304 40.913,16.304 ; 40.062,16.507 40.913,16.507 ; 40.062,16.71 40.913,16.71 ; 40.062,16.913 40.913,16.913 ; 40.062,17.116 40.913,17.116 ; 40.259,15.207 40.259,18.628 ; 40.462,15.207 40.462,18.628 ; 40.665,15.207 40.665,18.628 ; 40.869,15.207 40.869,18.628 ; 41.044,18.742 41.231,18.742 ; 41.044,18.945 41.231,18.945 ; 41.044,19.148 41.231,19.148 ; 41.044,19.352 41.231,19.352 ; 41.044,19.555 41.231,19.555 ; 41.044,19.758 41.237,19.758 ; 41.044,19.961 41.252,19.961 ; 41.044,20.164 41.252,20.164 ; 41.044,20.368 41.252,20.368 ; 41.044,20.571 41.252,20.571 ; 41.044,20.643 41.252,20.643 ; 41.072,17.416 41.072,20.643 ; 42.522,13.256 43.453,13.256 ; 42.697,13.086 42.697,13.314 ; 42.733,13.052 43.453,13.052 ; 42.901,12.89 42.901,13.314 ; 42.943,12.849 43.453,12.849 ; 43.104,12.69 43.104,13.314 ; 43.138,12.646 43.453,12.646 ; 43.238,12.443 43.453,12.443 ; 43.267,11.335 43.267,11.569 43.267,12.249 ; 43.267,11.63 43.453,11.63 ; 43.267,11.833 43.453,11.833 ; 43.267,12.036 43.453,12.036 ; 43.267,12.24 43.453,12.24 ; 43.33,11.427 43.453,11.427 ; 43.33,11.569 43.33,11.335 43.453,11.335 ; 16.703,33.239 16.703,33.388 ; 16.703,33.239 16.703,33.005 16.703,33.239 ; 16.703,33.388 16.703,34.023 ccw(c18.013,34.128) 16.926,33.388 16.703,33.388 ; 39.119,14.527 cw(c38.735,13.967) 39.217,14.446 ; 39.119,14.527 cw(c38.735,13.967) 39.217,14.446 ; 39.217,14.446 39.948,13.71 39.948,15.207 40.913,15.207 40.913,17.416 41.231,17.416 41.231,19.667 ; 41.044,20.347 41.044,20.622 41.044,20.347 ; 41.231,19.667 cw(c41.91,19.667) 41.252,19.836 ; 41.231,19.667 cw(c41.91,19.667) 41.252,19.836 ; 41.252,19.836 41.252,20.389 ; 41.252,20.389 41.252,20.643 ; 41.252,20.389 41.252,20.643 ; 43.059,12.738 cw(c42.587,12.249) 43.267,12.249 ; 43.059,12.738 cw(c42.587,12.249) 43.267,12.249 ; 43.059,12.738 42.461,13.314 43.453,13.314 43.453,11.737 ; 43.453,11.737 43.453,11.377 43.453,11.737
  Top Layer w0.508: pad.201@37.253,57.139 pad.200@39.075,57.139 ; pad.257@44.619,48.043 ?.69@46.323,48.043 ; pad.262@46.228,59.905 pad.295@47.329,60.995
  Top Layer w0.511: v1@14.901,51.271 pad.138@15.79,51.271 ; 15.706,34.891 pad.128@15.706,34.002 16.595,34.002 ; 16.806,34.128 pad.281@18.33,34.128 18.33,35.334 ; 20.955,9.692 ?.39@20.955,10.53 ; 31.157,15.35 ?.33@31.157,16.188 ; 33.991,9.943 ?.48@33.991,10.782 ; 37.211,15.434 ?.30@37.211,16.272 ; 42.799,13.422 ?.27@42.799,14.26 ; 43.561,12.374 pad.265@44.45,12.374
  Top Layer w0.813: pad.300@22.708,45.374 22.708,44.18 24.663,42.224 pad.223@28.092,42.224 ; pad.300@23.368,44.383 23.368,43.977 24.232,43.113 24.79,43.113 ; pad.204@25.866,42.571 23.419,45.018 23.063,45.018 23.063,44.282 24.486,42.859 pad.223@27.686,42.859
  Bottom Layer w0.762: pad.300@23.089,44.987 v1(24.172,44.313)
  other v1: 33.994,12.123 27.051,12.332 20.574,12.374 21.675,12.374 32.978,12.458 25.993,12.584 8.848,16.356 26.924,17.362 24.596,17.404 29.295,17.446 31.115,17.53 37.211,17.655 18.923,21.344 45.847,21.428 5.165,24.571 12.7,24.571 2.117,24.613 3.641,24.613 8.128,24.613 9.651,24.613 39.793,24.613 45.466,24.613 6.731,24.655 11.176,24.697 58.886,25.2 25.993,25.661 35.814,25.745 2.074,26.08 3.598,26.08 5.08,26.122 6.646,26.164 8.255,26.164 9.694,26.164 12.658,26.164 11.134,26.206 31.792,26.541 30.268,27.044 35.772,27.296 2.074,27.547 5.122,27.589 8.17,27.589 3.641,27.631 9.652,27.631 6.604,27.673 11.134,27.673 12.658,27.673 46.821,27.841 3.641,29.098 8.128,29.098 2.159,29.14 5.122,29.14 6.604,29.14 9.652,29.182 11.176,29.182 12.7,29.182 2.074,30.565 3.641,30.565 5.08,30.607 9.694,30.607 12.742,30.607 6.646,30.649 8.086,30.649 11.134,30.649 29.591,31.319 31.157,31.361 52.07,31.822 25.908,31.948 8.128,32.032 2.074,32.074 3.641,32.074 5.122,32.074 9.567,32.074 11.134,32.074 6.604,32.116 12.658,32.158 2.074,33.541 3.514,33.583 5.08,33.583 6.604,33.583 8.128,33.583 11.091,33.583 9.61,33.625 12.573,33.709 2.032,35.05 3.556,35.05 5.038,35.092 8.086,35.092 11.091,35.092 6.562,35.134 9.652,35.134 12.615,35.176 30.946,36.349 11.091,36.517 5.08,36.559 2.074,36.601 8.086,36.601 9.61,36.601 3.598,36.643 6.562,36.643 12.573,36.726 30.988,37.858 8.086,38.026 9.567,38.068 11.091,38.068 12.573,38.068 42.841,38.78 8.086,39.493 12.573,39.535 9.525,39.577 11.134,39.577 45.254,39.744 48.556,40.289 9.525,41.002 11.049,41.085 12.615,41.211 8.086,41.253 31.623,41.379 41.825,41.966 38.058,42.091 32.893,42.385 12.573,42.594 9.483,42.636 11.091,42.636 8.001,42.678 30.861,42.888 49.191,42.972 43.138,43.181 37.126,43.726 19.346,44.061 47.794,44.606 1.566,45.612 13.123,45.654 19.346,45.654 19.304,47.205 10.837,47.456 19.262,48.714 60.071,49.636 10.753,50.055 19.262,50.055 14.563,51.271 10.753,51.354 49.742,51.48 46.482,52.738 1.524,53.157 1.482,54.917 44.619,55.965 17.78,56.049 1.439,56.678 41.868,57.432 59.648,60.282 42.376,63.132 48.937,64.683
NewNet7: ?.76 pad.134 pad.135 pad.137 pad.140 | length 10.5
  Top Layer w0.381: ?.76@13.081,50.055 17.484,50.055 ; pad.134@17.526,47.037 pad.140@17.526,53.115